# Altium PCB gecko3_Panel.pcbdoc
Units mm, origin at the board's own origin, x right, y up, seen from the top; angles counter-clockwise.
Board outline 201.1 x 138.05 mm, 10 copper layers (Top Layer, MidLayer1, 1.2 & 2.5V Plane, GND Plane1, DDR layer 1, 3.3V Plane, DDR layer 2, GND Plane2, MidLayer2, Bottom Layer), stack 1.39 mm thick; 2 components, 567 nets, 10 pads, 0 vias.
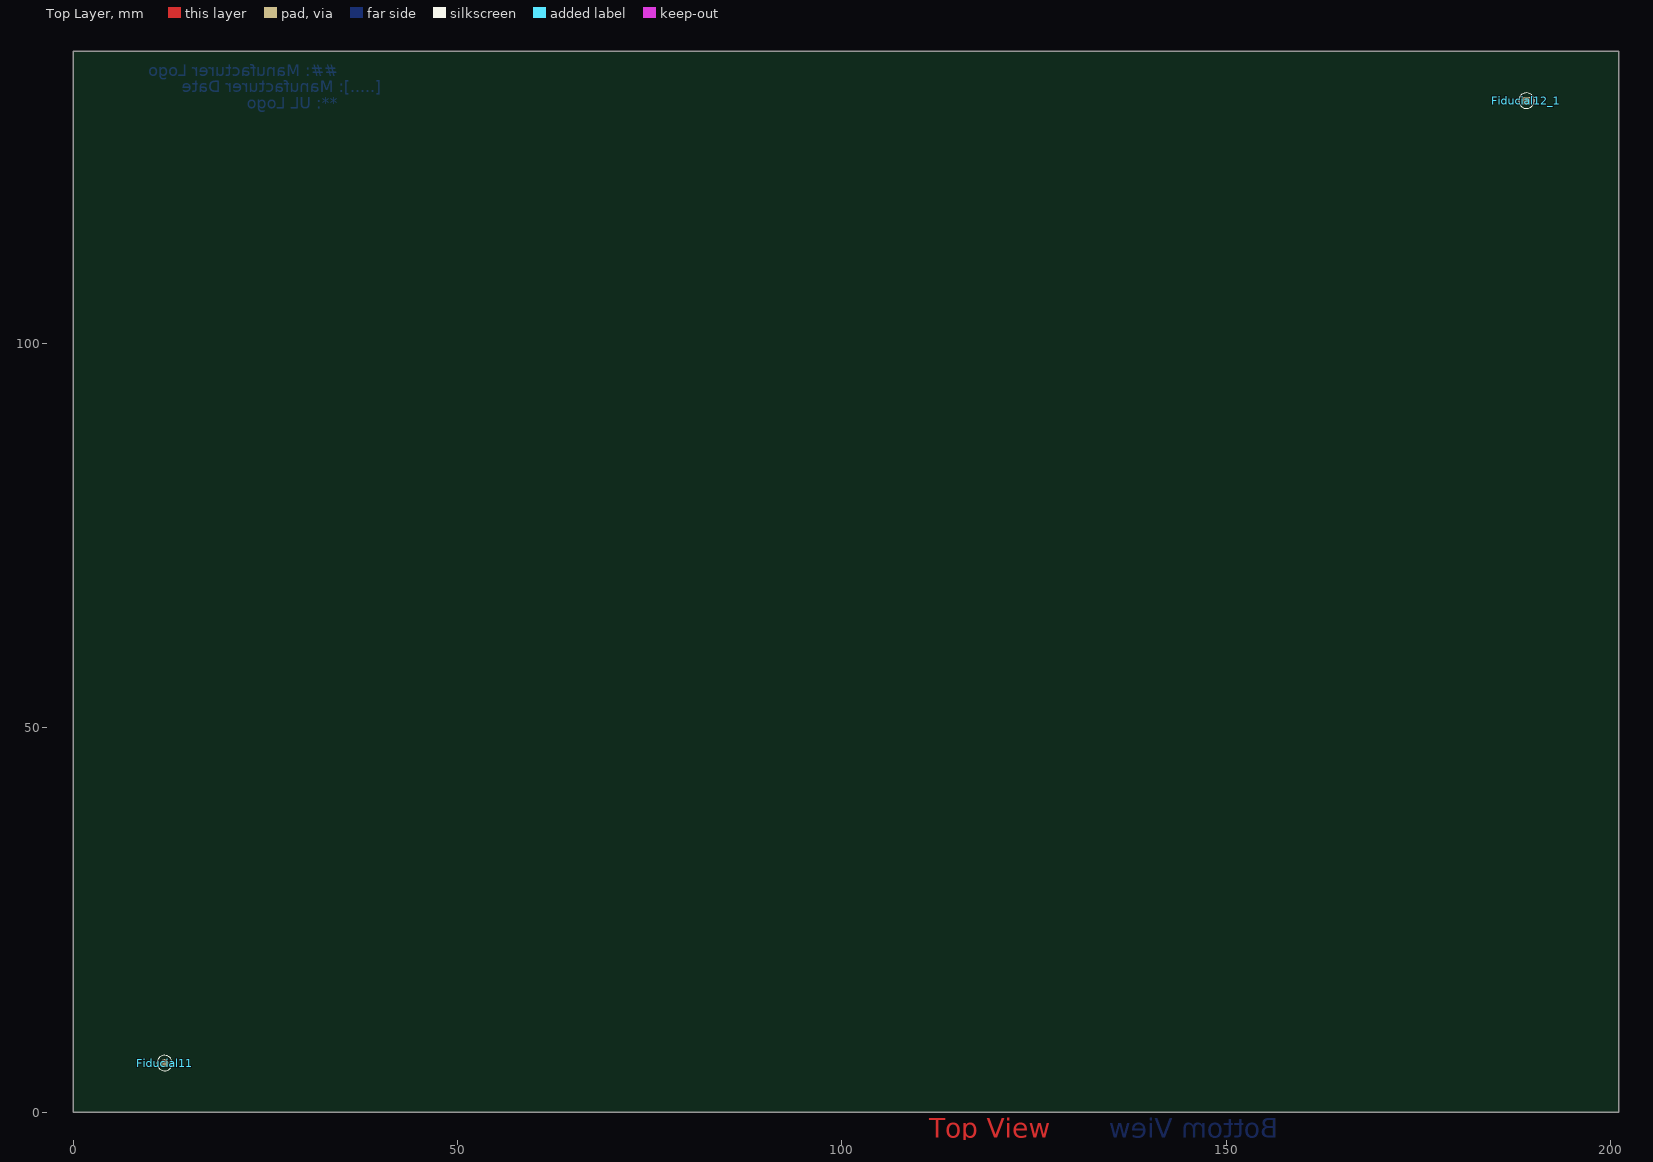
[diagram p0: Top Layer view]
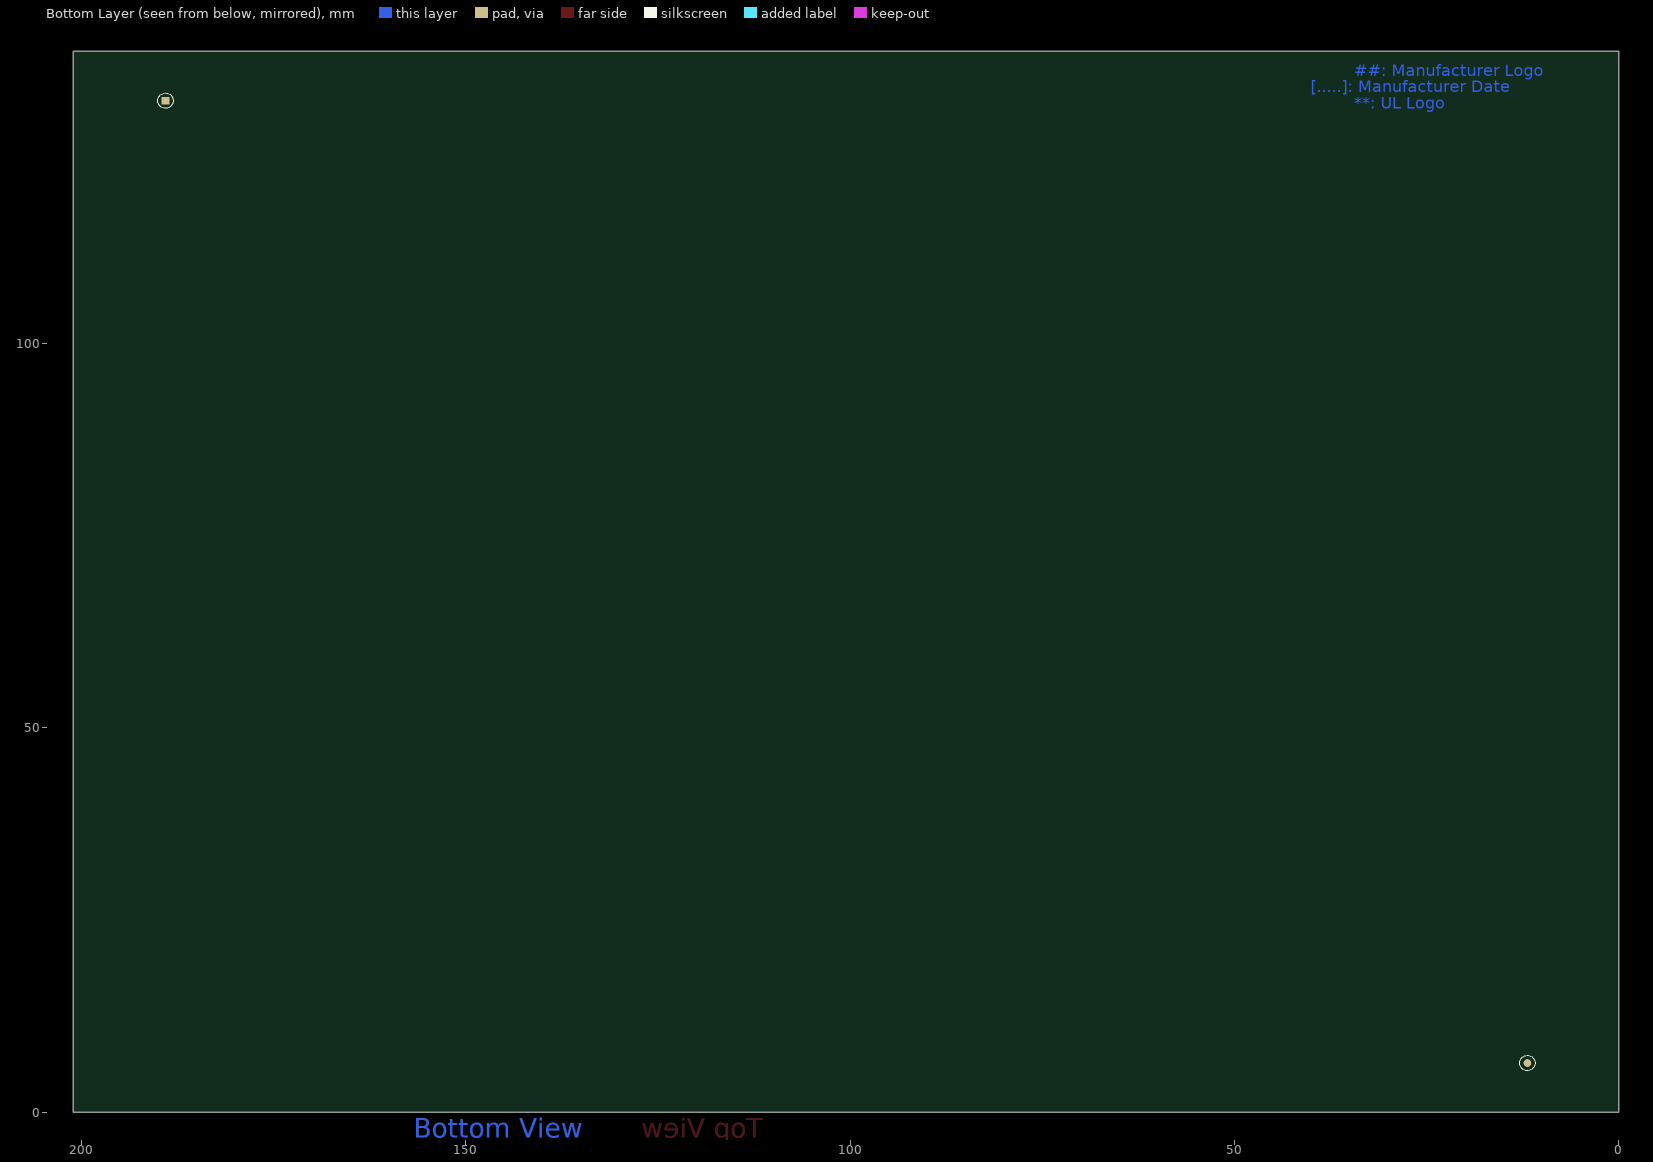
[diagram p1: Bottom Layer view, seen from below]
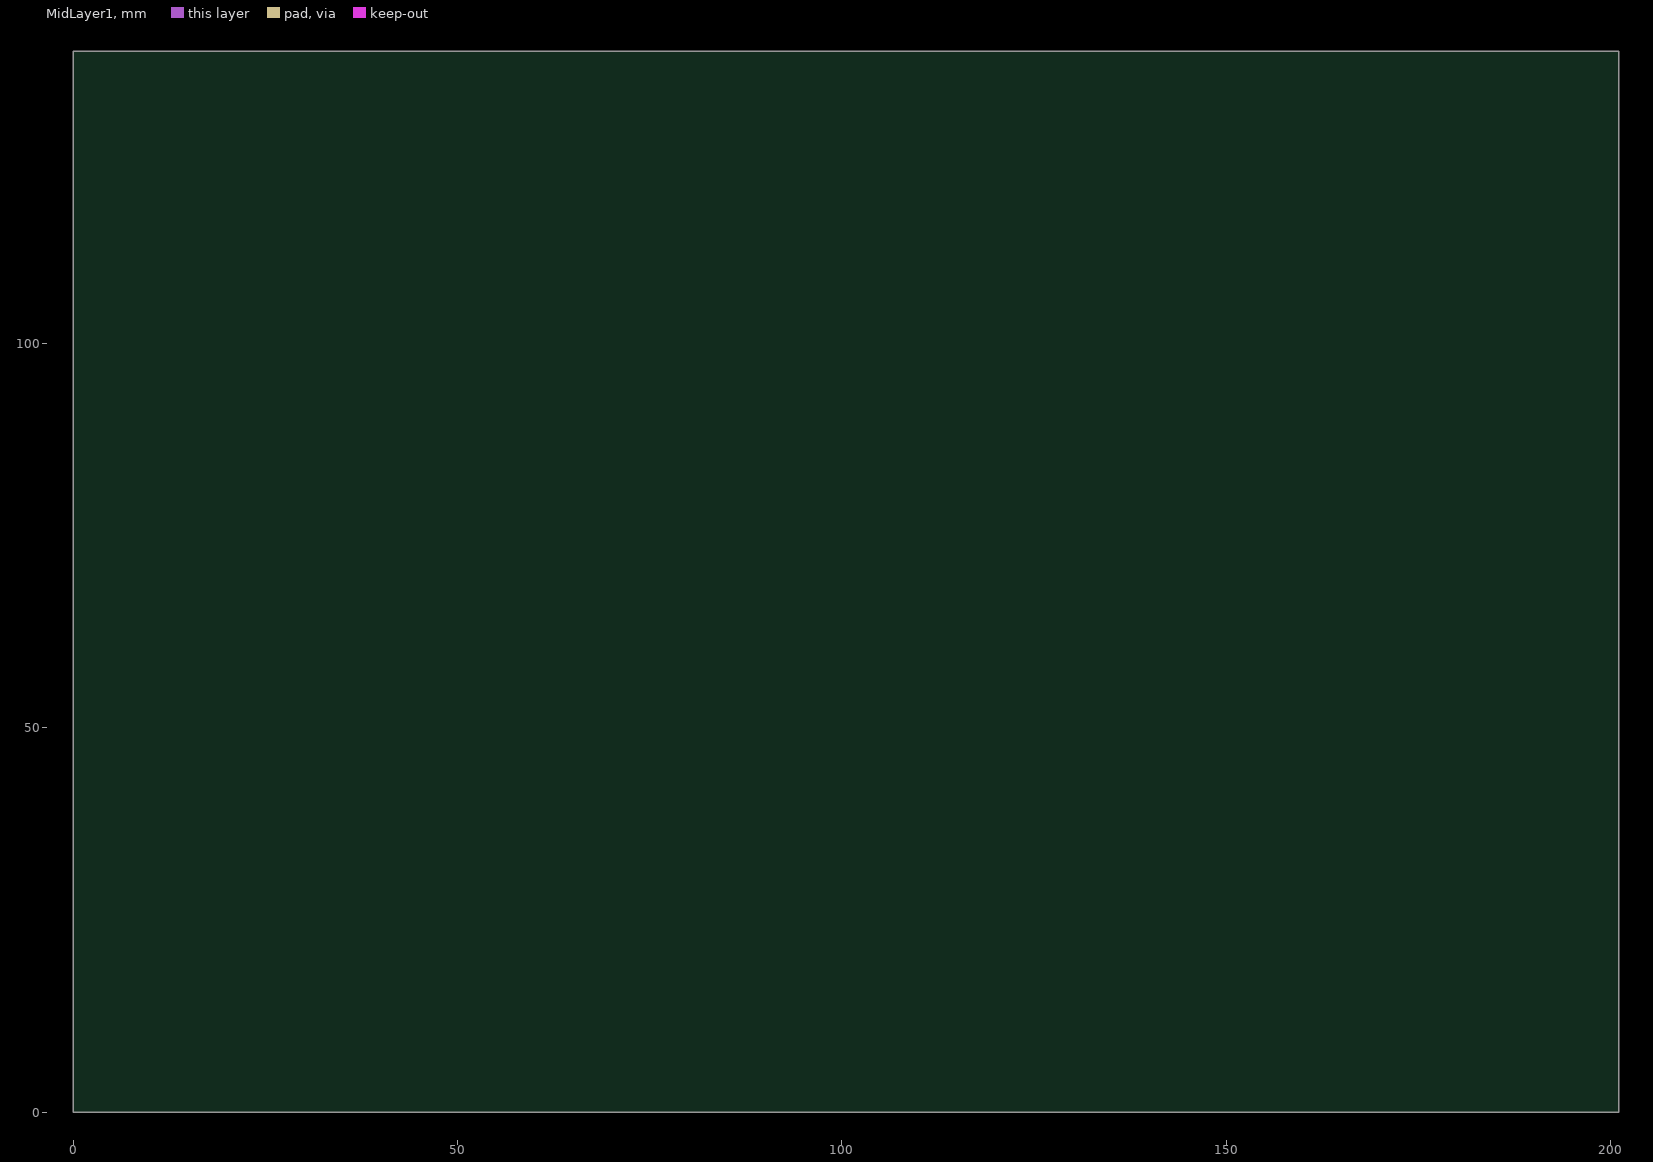
[diagram p2: MidLayer1]
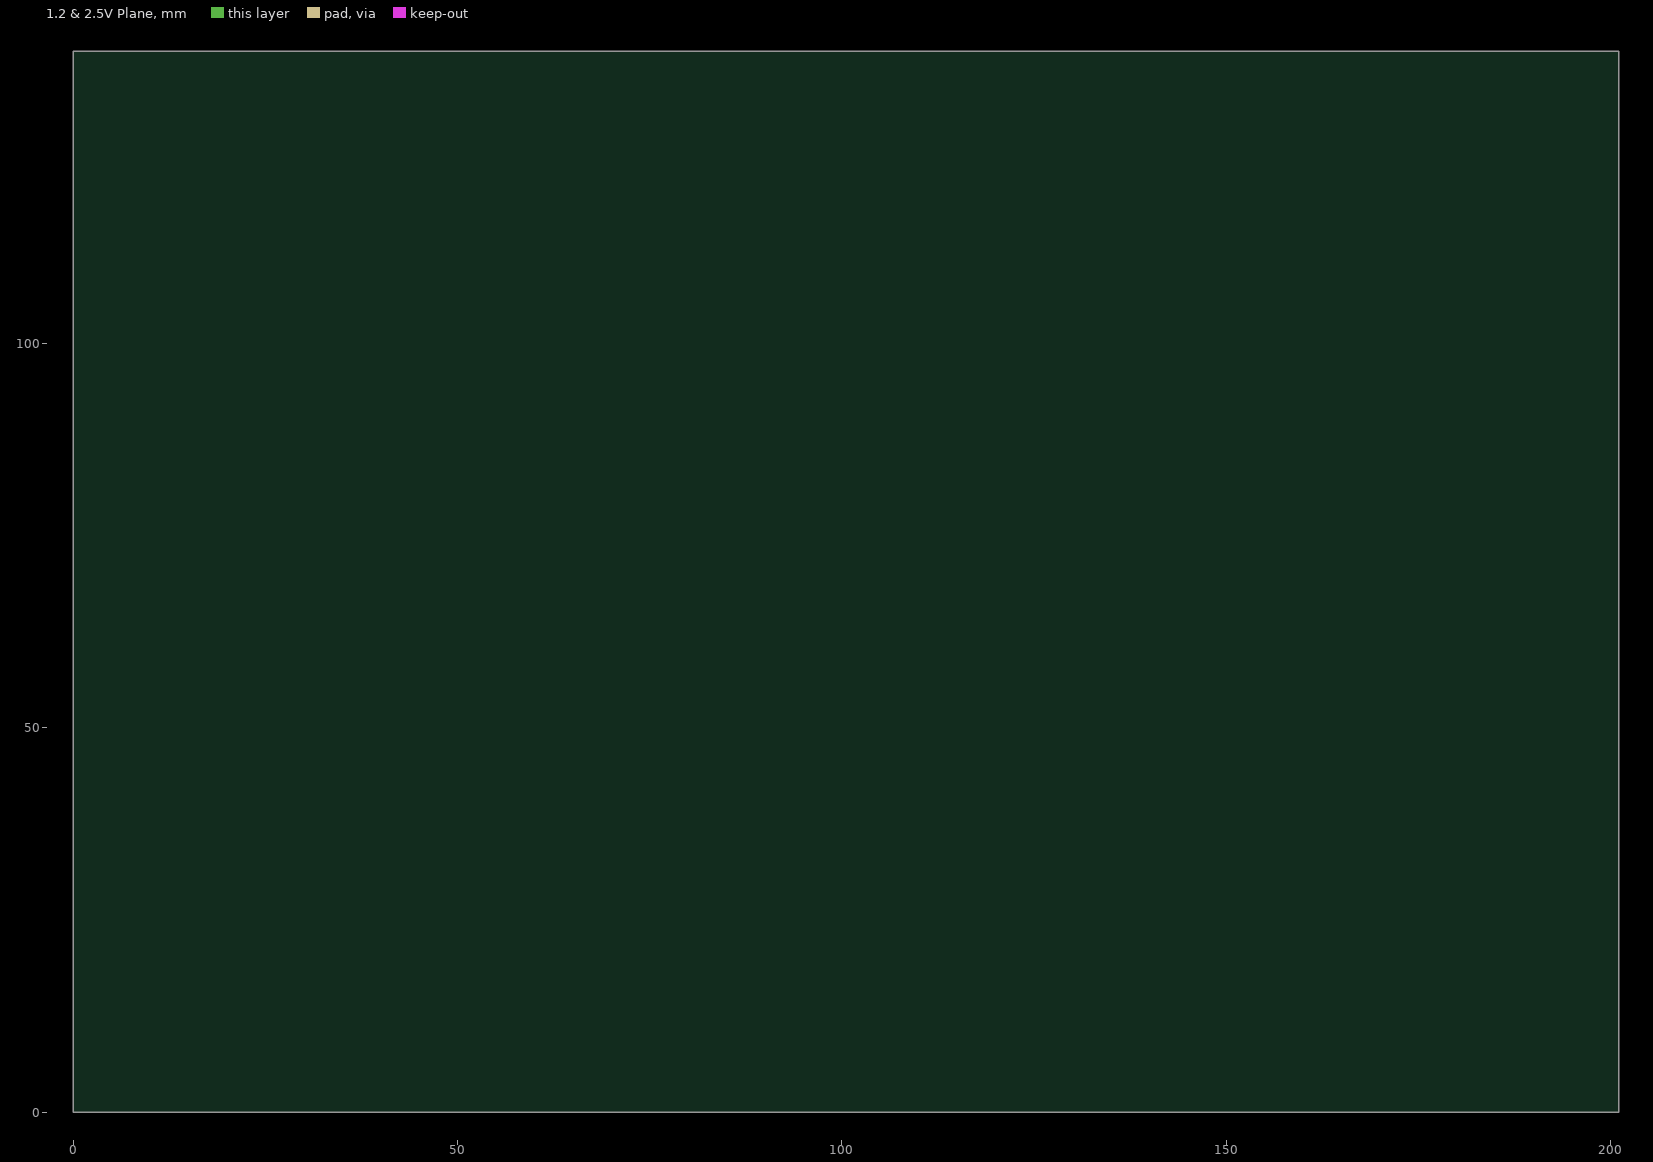
[diagram p3: 1.2 & 2.5V Plane]
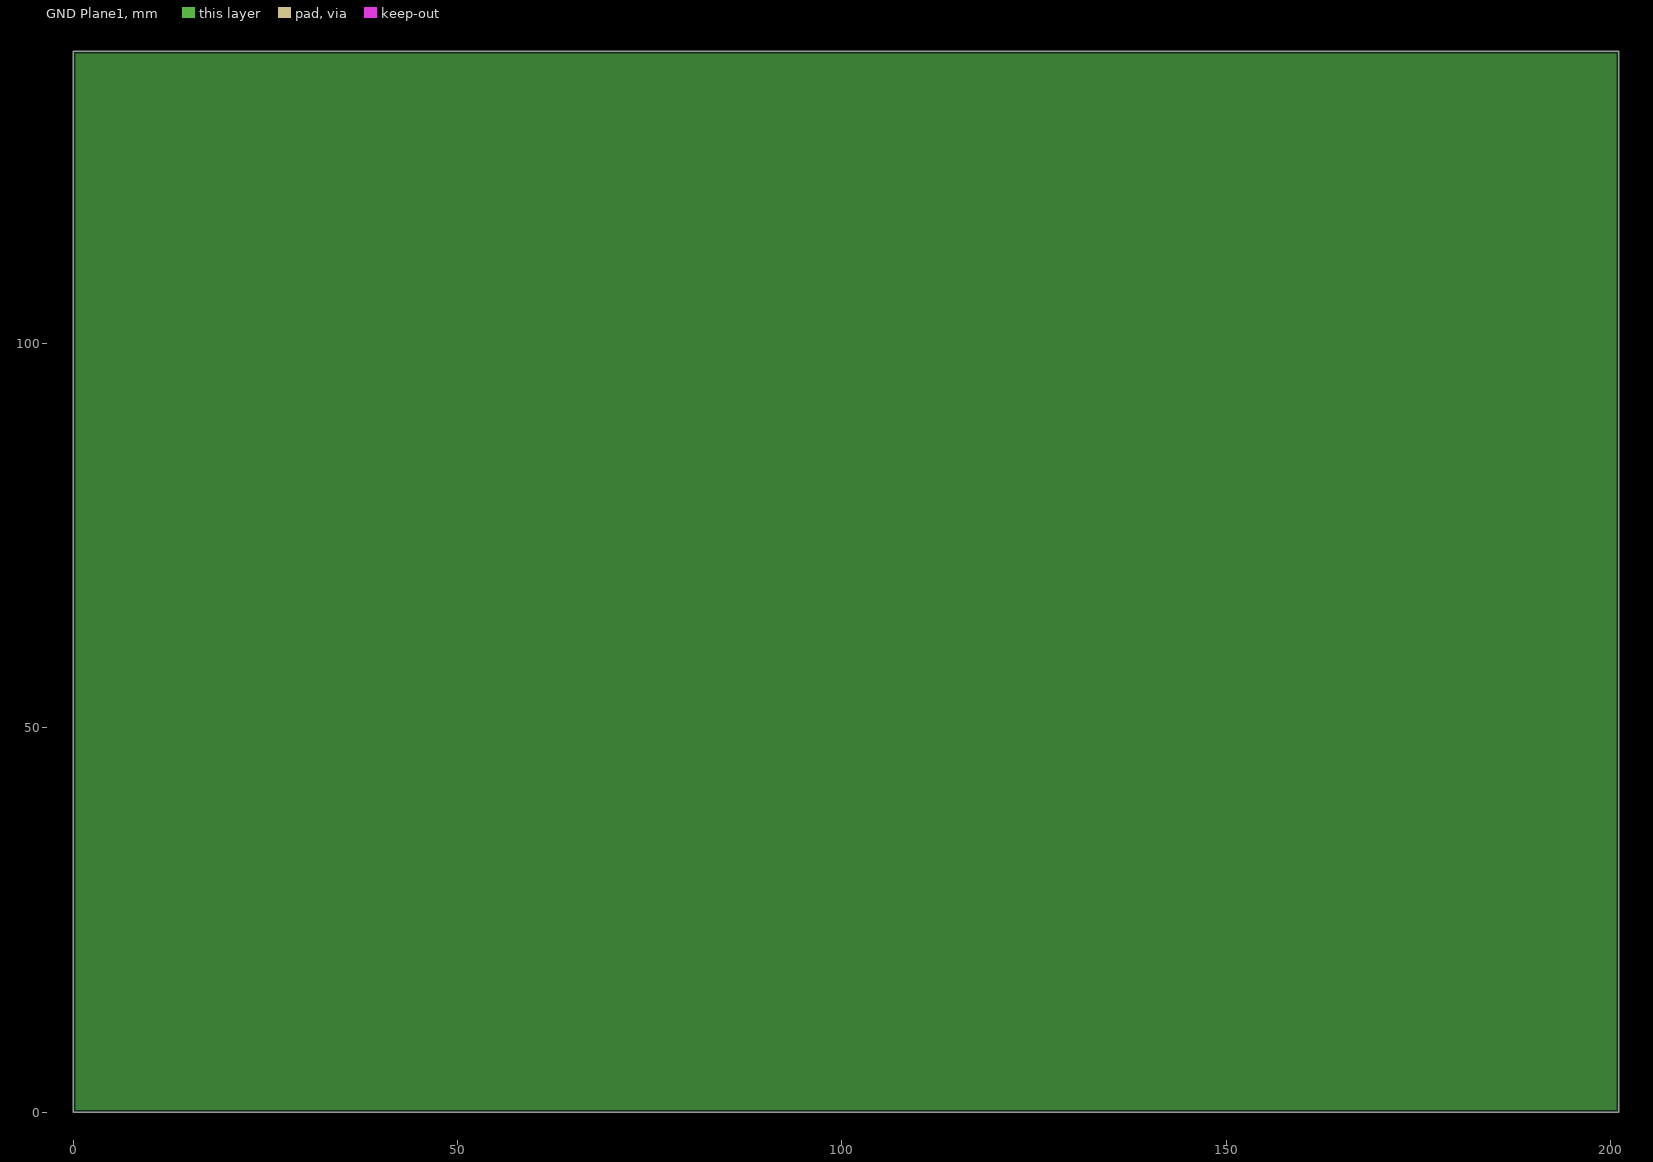
[diagram p4: GND Plane1, clearances drawn from the general rule]
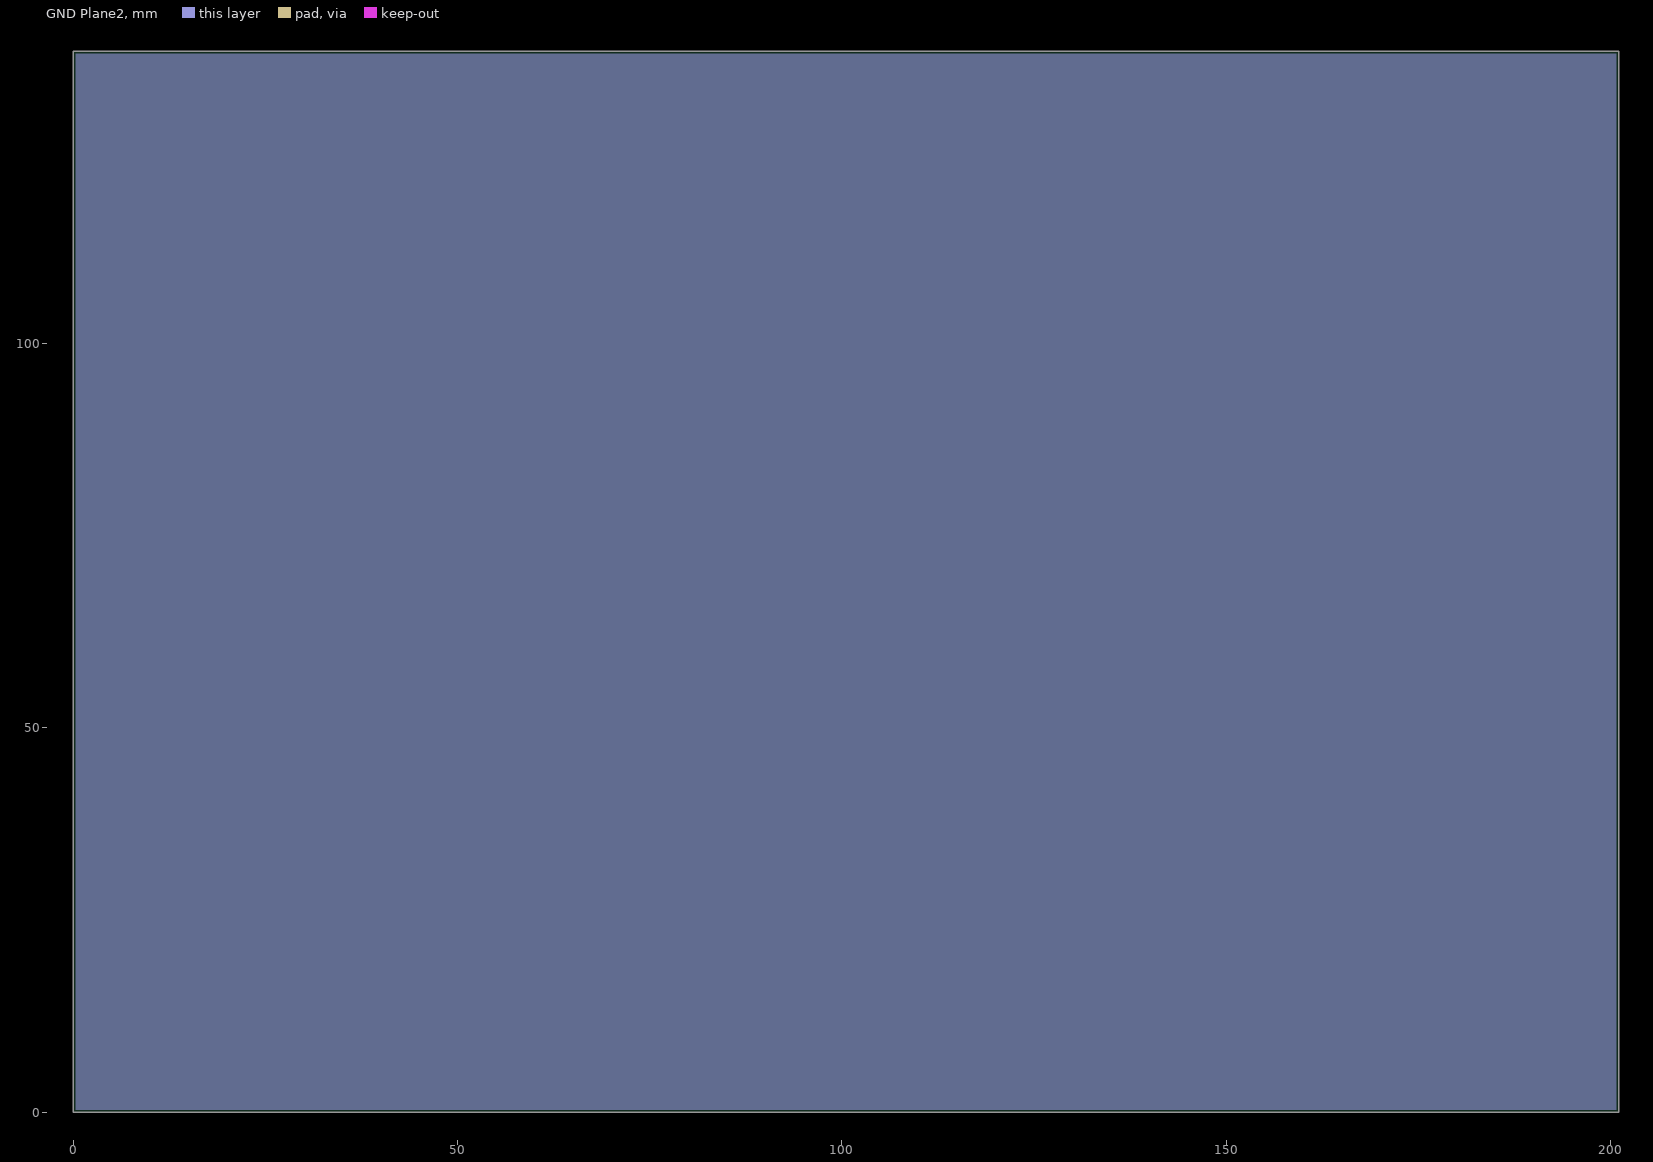
[diagram p5: GND Plane2, clearances drawn from the general rule]

## Layer stack, top to bottom
Top Layer: signal copper 0.018
Dielectric: prepreg 0.11, FR-4, Dk 4.8
MidLayer1: signal copper 0.018
Dielectric: core 0.1, FR-4, Dk 4.8
1.2 & 2.5V Plane: signal copper 0.018
Dielectric: prepreg 0.13, FR-4, Dk 4.8
GND Plane1: plane copper 0.018, net GND
Dielectric: core 0.2, FR-4, Dk 4.8
DDR layer 1: signal copper 0.018
Dielectric: prepreg 0.13, FR-4, Dk 4.8
3.3V Plane: signal copper 0.018
Dielectric: core 0.2, FR-4, Dk 4.8
DDR layer 2: signal copper 0.018
Dielectric: prepreg 0.13, FR-4, Dk 4.8
GND Plane2: plane copper 0.018, net GND
Dielectric: core 0.1, FR-4, Dk 4.8
MidLayer2: signal copper 0.018
Dielectric: prepreg 0.11, FR-4, Dk 4.8
Bottom Layer: signal copper 0.018

## Board outline
0,0 201.1,0 201.1,138.05 0,138.05

## Design rules (kind name [scope] priority, off if disabled: settings)
Clearance Clearance_keepout [OnLayer('Keep-Out Layer')] p1: gap=0
Clearance Clearance_earth [InNet('EARTH')] p2: gap=0.6
Clearance Clearance_plane [InNet('1.2V') vs InNet('2.5V')] p3: gap=0.2
Clearance Clearance_1 [All] p4: gap=0.125
ComponentClearance [OnLayer('Multi-Layer')] p1: gap=0.2 collisioncheckmode=3 verticalgap=0
ComponentClearance ComponentClearanceBottom [OnLayer('Bottom Layer') vs OnLayer('Bottom Layer')] p2: gap=0.2 collisioncheckmode=2 verticalgap=0.254
ComponentClearance ComponentClearanceTop [OnLayer('Top Layer') vs OnLayer('Top Layer')] p3: gap=0.2 collisioncheckmode=2 verticalgap=0.254
DiffPairsRouting [All] p1: maxlimit=0.6 minlimit=0.254 mostfreqgap=0.254 toplayer_maxgap=0.254 midlayer1_mingap=0.48 midlayer1_maxgap=0.52 midlayer1_prefgap=0.5 midlayer2_maxgap=0.254 midlayer3_maxgap=0.254 midlayer4_maxgap=0.254 midlayer6_maxgap=0.254 midlayer8_mingap=0.4 midlayer8_prefgap=0.475 bottomlayer_maxgap=0.254 maxuncoupledlength=12.7
Height Height_connector [InComponentClass('io-bus') Or InComponentClass('io-bus2')] p1: minheight=0 maxheight=25.4 prefheight=12.7
Height "Height on back side" [OnLayer('Bottom Layer')] p2: minheight=0 maxheight=2 prefheight=1
HoleSize [All] p1: absolutevalues=TRUE maxlimit=5 minlimit=0.15 maxpercent=80.000 minpercent=20.000
MatchedLengths "Schematic Matched Net Lengths_4" [InNetClass('ram')] p1: tolerance=3.6 amplitude=2.54 gap=0.508 style=90-Degree
MatchedLengths "Schematic Matched Net Lengths_3" [InNetClass('ram')] p2: tolerance=3.6 amplitude=2.54 gap=0.508 style=90-Degree
MatchedLengths "Schematic Matched Net Lengths_2" [InNetClass('ram-clock')] p3: tolerance=1 amplitude=2.54 gap=0.508 style=90-Degree
MatchedLengths "Schematic Matched Net Lengths_1" [InNetClass('ram-clock')] p4: tolerance=1 amplitude=2.54 gap=0.508 style=90-Degree
MatchedLengths "Schematic Matched Net Lengths" [InNetClass('usb-d')] p5: tolerance=1 amplitude=2.54 gap=0.508 style=90-Degree
MaxMinImpedance "Schematic Impedance Constraint_4" [InNetClass('usb-d')] p1: minimum=79.00 maximum=100.0
MaxMinImpedance "Schematic Impedance Constraint_3" [InNetClass('ram')] p2: minimum=40.00 maximum=70.00
MaxMinImpedance "Schematic Impedance Constraint_2" [InNetClass('ram')] p3: minimum=40.00 maximum=70.00
MaxMinImpedance "Schematic Impedance Constraint_1" [InNetClass('ram-clock')] p4: minimum=40.00 maximum=70.00
MaxMinImpedance "Schematic Impedance Constraint" [InNetClass('ram-clock')] p5: minimum=40.00 maximum=70.00
MaximumViaCount "Schematic Maximum Via Count Constraint_3" [InNetClass('ram-clock')] p1: limit=2
MaximumViaCount "Schematic Maximum Via Count Constraint_2" [InNetClass('ram-clock')] p2: limit=2
MaximumViaCount "Schematic Maximum Via Count Constraint_1" [InNetClass('ram')] p3: limit=2
MaximumViaCount "Schematic Maximum Via Count Constraint" [InNetClass('ram')] p4: limit=2
OvershootFalling "Schematic Overshoot - Falling Edge_3" [InNetClass('ram')] p1: maximum=300.0m
OvershootFalling "Schematic Overshoot - Falling Edge_2" [InNetClass('ram-clock')] p2: maximum=300.0m
OvershootFalling "Schematic Overshoot - Falling Edge_1" [InNetClass('ram-clock')] p3: maximum=300.0m
OvershootFalling "Schematic Overshoot - Falling Edge" [InNetClass('ram')] p4: maximum=300.0m
OvershootRising "Schematic Overshoot - Rising Edge_3" [InNetClass('ram-clock')] p1: maximum=300.0m
OvershootRising "Schematic Overshoot - Rising Edge_2" [InNetClass('ram')] p2: maximum=300.0m
OvershootRising "Schematic Overshoot - Rising Edge_1" [InNetClass('ram-clock')] p3: maximum=300.0m
OvershootRising "Schematic Overshoot - Rising Edge" [InNetClass('ram')] p4: maximum=300.0m
PlaneClearance [All] p1: clearance=0.2
PlaneConnect [All] p1: planeconnectstyle=Direct reliefexpansion=0.508 reliefentries=4 reliefconductorwidth=0.254 reliefairgap=0.254
PolygonConnect [All] p1: connectstyle=Direct reliefconductorwidth=0.254 reliefentries=4 polygonreliefangle="90 Angle"
RoomDefinition dram2 [InComponentClass('dram2')] p1: confinementstyle=ConfineIn formatcopy=TRUE lockcomponents=FALSE outline 382.197,31.267 382.197,34.435 388.272,40.85 392.157,41.325 405.465,41.325 409.825,39.9 410.125,32.7 410.125,28.792 409.725,19.642 405.465,17.667 392.157,17.667 387.847,18.867
RoomDefinition dram1 [InComponentClass('dram1')] p2: confinementstyle=ConfineIn formatcopy=TRUE lockcomponents=FALSE outline 376.632,60.907 376.632,62.235 388.272,64.25 392.157,64.4 405.465,64.4 409.85,63.45 409.85,59.542 409.75,42.817 405.465,40.742 392.157,40.742 388.222,41.792
RoomDefinition power [InComponentClass('power')] p3: confinementstyle=ConfineIn formatcopy=TRUE lockcomponents=FALSE outline 357.996,11.386 357.996,13.514 358.646,18.939 364.444,27.556 390.496,63.829 404.004,63.829 404.004,55.121 402.029,42.561 395.789,15.811 368.464,10.111 363.436,10.111
RoomDefinition io-bus2 [InComponentClass('io-bus2')] p4: confinementstyle=ConfineIn formatcopy=TRUE lockcomponents=FALSE outline 350.479,9.914 350.479,64.349 350.879,64.35 357.907,64.35 358.307,64.349 358.307,9.914
RoomDefinition io-bus [InComponentClass('io-bus')] p5: confinementstyle=ConfineIn formatcopy=TRUE lockcomponents=FALSE outline 340.611,9.914 340.611,64.348 341.011,64.349 348.039,64.349 348.439,64.348 368.938,33.3 368.938,27.842 348.439,9.914
RoomDefinition ethernet [InComponentClass('ethernet')] p6: confinementstyle=ConfineIn formatcopy=TRUE lockcomponents=FALSE outline 404.161,45.811 404.161,56.339 404.236,58.664 404.686,63.881 419.914,63.881 425.445,59.576 425.779,59.229 425.779,52.646 425.439,47.361 421.764,43.721 420.436,43.721
RoomDefinition flash [InComponentClass('flash') vs False] p7: confinementstyle=ConfineIn formatcopy=TRUE lockcomponents=FALSE outline 358.686,18.996 358.686,34.354 384.842,34.858 387.27,34.858 396.814,34.354 399.614,31.514 399.614,30.186 396.814,18.996
RoomDefinition switches [InComponentClass('switches')] p8: confinementstyle=ConfineIn formatcopy=TRUE lockcomponents=FALSE outline 375.911,11.271 375.911,14.439 375.936,18.539 398.602,21.133 409.475,21.133 409.475,10.105 398.909,9.891 378.118,9.891 376.011,10.461
RoomDefinition i2c [InComponentClass('i2c')] p9: confinementstyle=ConfineIn formatcopy=TRUE lockcomponents=FALSE outline 398.291,21.446 398.291,27.559 406.301,27.559 418.306,17.514 420.439,13.364 420.439,10.111 418.311,10.111 405.711,13.186 402.461,14.471
RoomDefinition jtag [InComponentClass('jtag')] p10: confinementstyle=ConfineIn formatcopy=TRUE lockcomponents=FALSE outline 416.161,46.271 416.161,50.879 425.779,50.879 425.909,46.504 425.909,30.556 417.571,30.556
RoomDefinition spi-flash [InComponentClass('spi-flash')] p11: confinementstyle=ConfineIn formatcopy=TRUE lockcomponents=FALSE outline 396.696,31.521 396.696,38.354 406.554,38.354 406.554,31.521
RoomDefinition usb [InComponentClass('usb')] p12: confinementstyle=ConfineIn formatcopy=TRUE lockcomponents=FALSE outline 402.711,39.069 402.711,44.631 407.786,45.614 411.171,45.614 414.339,45.614 423.814,43.789 425.389,33.939 425.564,30.389 425.564,29.061 425.381,14.994 418.484,9.816 409.093,9.816
RoomDefinition fpga-config [InComponentClass('fpga-config')] p13: confinementstyle=ConfineIn formatcopy=TRUE lockcomponents=FALSE outline 347.721,21.561 347.721,22.889 347.746,55.039 347.861,61.389 348.109,64.138 357.911,64.379 359.239,64.379 381.014,64.039 387.214,63.879 401.664,50.264 401.689,42.289 401.689,40.961 395.664,11.336 350.289,9.771 348.161,9.771 347.746,12.911
RoomDefinition fpga1 [InComponentClass('fpga1')] p14: confinementstyle=ConfineIn formatcopy=TRUE lockcomponents=FALSE outline 359.648,34.195 359.648,61.903 371.696,63.256 374.906,63.256 388.156,61.903 398.549,55.147 398.549,47.273 388.156,34.195
RoomDefinition fpga2 [InComponentClass('fpga2')] p15: confinementstyle=ConfineIn formatcopy=TRUE lockcomponents=FALSE outline 387.167,56.827 387.167,60.037 388.578,60.037 388.584,57.217 388.584,54.007 387.172,54.007
RoutingVias [All] p1: holewidth=0.2 width=0.45 viastyle="Through Hole" minholewidth=0.15 minwidth=0.35 maxholewidth=1 maxwidth=2
SignalStimulus "Schematic Signal Stimulus_3" [InNetClass('ram')] p1: kind=2 level=0 starttime=0.000 stoptime=1.800n periodtime=3.600n
SignalStimulus "Schematic Signal Stimulus_2" [InNetClass('ram-clock')] p2: kind=2 level=0 starttime=0.000 stoptime=1.800n periodtime=3.600n
SignalStimulus "Schematic Signal Stimulus_1" [InNetClass('ram')] p3: kind=2 level=0 starttime=0.000 stoptime=1.800n periodtime=3.600n
SignalStimulus "Schematic Signal Stimulus" [InNetClass('ram-clock')] p4: kind=2 level=0 starttime=0.000 stoptime=1.800n periodtime=3.600n
SolderMaskExpansion [All] p1: expansion=0.102
SupplyNets "Schematic Supply Nets_4" [InNet('2.5V')] p1: voltage=2.500
SupplyNets "Schematic Supply Nets_5" [InNet('2.5V')] p2: voltage=2.500
SupplyNets "Schematic Supply Nets_2" [InNet('VREF')] p3: voltage=1.250
SupplyNets "Schematic Supply Nets_3" [InNet('VREF')] p4: voltage=1.250
SupplyNets "Schematic Supply Nets" [InNet('GND')] p5: voltage=0.000
SupplyNets "Schematic Supply Nets_1" [InNet('GND')] p6: voltage=0.000
TestPointUsage [All] p1: valid=0 allowmultiple=FALSE
Testpoint [All] p1: side=15 testpointundercomponent=TRUE minsize=1.016 maxsize=2.54 preferedsize=1.524 minholesize=0 maxholesize=1.016 preferedholesize=0.813 testpointgrid=0.025 style=1023 order=0123456789
UndershootFalling "Schematic Undershoot - Falling Edge_3" [InNetClass('ram')] p1: maximum=300.0m
UndershootFalling "Schematic Undershoot - Falling Edge_2" [InNetClass('ram')] p2: maximum=300.0m
UndershootFalling "Schematic Undershoot - Falling Edge_1" [InNetClass('ram-clock')] p3: maximum=300.0m
UndershootFalling "Schematic Undershoot - Falling Edge" [InNetClass('ram-clock')] p4: maximum=300.0m
UndershootRising "Schematic Undershoot - Rising Edge_3" [InNetClass('ram')] p1: maximum=300.0m
UndershootRising "Schematic Undershoot - Rising Edge_2" [InNetClass('ram')] p2: maximum=300.0m
UndershootRising "Schematic Undershoot - Rising Edge_1" [InNetClass('ram-clock')] p3: maximum=300.0m
UndershootRising "Schematic Undershoot - Rising Edge" [InNetClass('ram-clock')] p4: maximum=300.0m
Width [All] p1: maxlimit=5 minlimit=0.1 preferedwidth=0.2 midlayer4_prefwidth=0.1 midlayer6_prefwidth=0.1 minimp=50.000000 maximp=50.000000 favimp=50.000000
13 further rules are at their usual default settings.

## Classes and differential pairs
net class GPIO2_[0..115]: GPIO2_0 GPIO2_1 GPIO2_2 GPIO2_3 GPIO2_4 GPIO2_5 GPIO2_6 GPIO2_7 GPIO2_8 GPIO2_9 GPIO2_10 GPIO2_11 GPIO2_12 GPIO2_13 GPIO2_14 GPIO2_15 GPIO2_16 GPIO2_17 GPIO2_18 GPIO2_19 GPIO2_20 GPIO2_21 GPIO2_22 GPIO2_23 GPIO2_24 GPIO2_25 GPIO2_26 GPIO2_27 GPIO2_28 GPIO2_29 GPIO2_30 GPIO2_31 GPIO2_32 GPIO2_33 GPIO2_34 GPIO2_35 GPIO2_36 GPIO2_37 GPIO2_38 GPIO2_39 GPIO2_40 GPIO2_41 GPIO2_42 GPIO2_43 GPIO2_44 GPIO2_45 GPIO2_46 GPIO2_47 GPIO2_48 GPIO2_49 GPIO2_50 GPIO2_51 GPIO2_52 GPIO2_53 GPIO2_54 GPIO2_55 GPIO2_56 GPIO2_57 GPIO2_58 GPIO2_59 GPIO2_60 GPIO2_61 GPIO2_62 GPIO2_63 GPIO2_64 GPIO2_65 GPIO2_66 GPIO2_67 GPIO2_68 GPIO2_69 GPIO2_70 GPIO2_71 GPIO2_72 GPIO2_73 GPIO2_74 GPIO2_75 GPIO2_76 GPIO2_77 GPIO2_78 GPIO2_79 GPIO2_80 GPIO2_81 GPIO2_82 GPIO2_83 GPIO2_84 GPIO2_85 GPIO2_86 GPIO2_87 GPIO2_88 GPIO2_89 GPIO2_90 GPIO2_91 GPIO2_92 GPIO2_93 GPIO2_94 GPIO2_95 GPIO2_96 GPIO2_97 GPIO2_98 GPIO2_99 GPIO2_100 GPIO2_101 GPIO2_102 GPIO2_103 GPIO2_104 GPIO2_105 GPIO2_106 GPIO2_107 GPIO2_108 GPIO2_109 GPIO2_110 GPIO2_111 GPIO2_112 GPIO2_113 GPIO2_114 GPIO2_115
net class GPIO1_[0..51]: GPIO1_0 GPIO1_1 GPIO1_2 GPIO1_3 GPIO1_4 GPIO1_5 GPIO1_6 GPIO1_7 GPIO1_8 GPIO1_9 GPIO1_10 GPIO1_11 GPIO1_12 GPIO1_13 GPIO1_14 GPIO1_15 GPIO1_16 GPIO1_17 GPIO1_18 GPIO1_19 GPIO1_20 GPIO1_21 GPIO1_22 GPIO1_23 GPIO1_24 GPIO1_25 GPIO1_26 GPIO1_27 GPIO1_28 GPIO1_29 GPIO1_30 GPIO1_31 GPIO1_32 GPIO1_33 GPIO1_34 GPIO1_35 GPIO1_36 GPIO1_37 GPIO1_38 GPIO1_39 GPIO1_40 GPIO1_41 GPIO1_42 GPIO1_43 GPIO1_44 GPIO1_45 GPIO1_46 GPIO1_47 GPIO1_48 GPIO1_49 GPIO1_50 GPIO1_51
net class FLASH_D1_[0..15]: FLASH_D1_0 FLASH_D1_1 FLASH_D1_2 FLASH_D1_3 FLASH_D1_4 FLASH_D1_5 FLASH_D1_6 FLASH_D1_7 FLASH_D1_8 FLASH_D1_9 FLASH_D1_10 FLASH_D1_11 FLASH_D1_12 FLASH_D1_13 FLASH_D1_14 FLASH_D1_15
net class FLASH_D0_[0..15]: FLASH_D0_0 FLASH_D0_1 FLASH_D0_2 FLASH_D0_3 FLASH_D0_4 FLASH_D0_5 FLASH_D0_6 FLASH_D0_7 FLASH_D0_8 FLASH_D0_9 FLASH_D0_10 FLASH_D0_11 FLASH_D0_12 FLASH_D0_13 FLASH_D0_14 FLASH_D0_15
net class DRAM_A1_[0..13]: DRAM_A1_0 DRAM_A1_1 DRAM_A1_2 DRAM_A1_3 DRAM_A1_4 DRAM_A1_5 DRAM_A1_6 DRAM_A1_7 DRAM_A1_8 DRAM_A1_9 DRAM_A1_10 DRAM_A1_11 DRAM_A1_12 DRAM_A1_13 DRAM_A1_14 DRAM_A1_15
net class DRAM_A0_[0..13]: DRAM_A0 DRAM_A0_0 DRAM_A0_1 DRAM_A0_2 DRAM_A0_3 DRAM_A0_4 DRAM_A0_5 DRAM_A0_6 DRAM_A0_7 DRAM_A0_8 DRAM_A0_9 DRAM_A0_10 DRAM_A0_11 DRAM_A0_12 DRAM_A0_13 DRAM_A1 DRAM_A2 DRAM_A3 DRAM_A4 DRAM_A5 DRAM_A6 DRAM_A7 DRAM_A8 DRAM_A9 DRAM_A10 DRAM_A11 DRAM_A12 DRAM_A13
net class BUTTON[0..2]: BUTTON0 BUTTON1 BUTTON2
net class usb-d: NetJP1_USB_D+ NetJP1_USB_D-
net class TXD_[0..3]: TXD_0 TXD_1 TXD_2 TXD_3
net class RXD_[0..3]: RXD_0 RXD_1 RXD_2 RXD_3
net class LED[0..7]: LED0 LED1 LED2 LED3 LED4 LED5 LED6 LED7
component class spi-flash: U1_SPI
net class SWITCH[0..3]: SWITCH0 SWITCH1 SWITCH2 SWITCH3
net class PWM[0..7]: PWM0 PWM1 PWM2 PWM3 PWM4 PWM5 PWM6 PWM7
net class ENCODER[0..7]: ENCODER0 ENCODER1 ENCODER2 ENCODER3 ENCODER4 ENCODER5 ENCODER6 ENCODER7
net class D[0..15]: D0 D1 D2 D3 D4 D5 D6 D7 D8 D9 D10 D11 D12 D13 D14 D15
net class DRAM_D0_[0..15]: DRAM_D0_0 DRAM_D0_1 DRAM_D0_2 DRAM_D0_3 DRAM_D0_4 DRAM_D0_5 DRAM_D0_6 DRAM_D0_7 DRAM_D0_8 DRAM_D0_9 DRAM_D0_10 DRAM_D0_11 DRAM_D0_12 DRAM_D0_13 DRAM_D0_14 DRAM_D0_15 DRAM_DQ0 DRAM_DQ1 DRAM_DQ2 DRAM_DQ3 DRAM_DQ4 DRAM_DQ5 DRAM_DQ6 DRAM_DQ7 DRAM_DQ8 DRAM_DQ9 DRAM_DQ10 DRAM_DQ11 DRAM_DQ12 DRAM_DQ13 DRAM_DQ14 DRAM_DQ15
net class DRAM_D1_[0..15]: DRAM_D1_0 DRAM_D1_1 DRAM_D1_2 DRAM_D1_3 DRAM_D1_4 DRAM_D1_5 DRAM_D1_6 DRAM_D1_7 DRAM_D1_8 DRAM_D1_9 DRAM_D1_10 DRAM_D1_11 DRAM_D1_12 DRAM_D1_13 DRAM_D1_14 DRAM_D1_15
net class FLASH_A[0..23]: FLASH_A0 FLASH_A1 FLASH_A2 FLASH_A3 FLASH_A4 FLASH_A5 FLASH_A6 FLASH_A7 FLASH_A8 FLASH_A9 FLASH_A10 FLASH_A11 FLASH_A12 FLASH_A13 FLASH_A14 FLASH_A15 FLASH_A16 FLASH_A17 FLASH_A18 FLASH_A19 FLASH_A20 FLASH_A21 FLASH_A22 FLASH_A23
net class ram-clock: DRAM_C\K\0 DRAM_C\K\1 DRAM_CK0 DRAM_CK0_FB DRAM_CK1 DRAM_CK1_FB
net class ram: DRAM_A0_0 DRAM_A0_1 DRAM_A0_2 DRAM_A0_3 DRAM_A0_4 DRAM_A0_5 DRAM_A0_6 DRAM_A0_7 DRAM_A0_8 DRAM_A0_9 DRAM_A0_10 DRAM_A0_11 DRAM_A0_12 DRAM_A0_13 DRAM_A1_0 DRAM_A1_1 DRAM_A1_2 DRAM_A1_3 DRAM_A1_4 DRAM_A1_5 DRAM_A1_6 DRAM_A1_7 DRAM_A1_8 DRAM_A1_9 DRAM_A1_10 DRAM_A1_11 DRAM_A1_12 DRAM_A1_13 DRAM_BA0_0 DRAM_BA0_1 DRAM_BA1_0 DRAM_BA1_1 DRAM_C\A\S\0 DRAM_C\A\S\1 DRAM_C\K\0 DRAM_C\K\1 DRAM_C\S\0 DRAM_C\S\1 DRAM_CK0 DRAM_CK0_FB DRAM_CK1 DRAM_CK1_FB DRAM_CKE0 DRAM_CKE1 DRAM_D0_0 DRAM_D0_1 DRAM_D0_2 DRAM_D0_3 DRAM_D0_4 DRAM_D0_5 DRAM_D0_6 DRAM_D0_7 DRAM_D0_8 DRAM_D0_9 DRAM_D0_10 DRAM_D0_11 DRAM_D0_12 DRAM_D0_13 DRAM_D0_14 DRAM_D0_15 DRAM_D1_0 DRAM_D1_1 DRAM_D1_2 DRAM_D1_3 DRAM_D1_4 DRAM_D1_5 DRAM_D1_6 DRAM_D1_7 DRAM_D1_8 DRAM_D1_9 DRAM_D1_10 DRAM_D1_11 DRAM_D1_12 DRAM_D1_13 DRAM_D1_14 DRAM_D1_15 DRAM_LDM0 DRAM_LDM1 DRAM_LDQS0 DRAM_LDQS1 DRAM_R\A\S\0 DRAM_R\A\S\1 DRAM_UDM0 DRAM_UDM1 DRAM_UDQS0 DRAM_UDQS1 DRAM_W\E\0 DRAM_W\E\1
differential pair eth_td: +TD+ -TD-
differential pair eth_rd: +RD+ -RD-
differential pair DRAM_clk1: +DRAM_CK1 -DRAM_C\K\1
differential pair DRAM_clk0: +DRAM_CK0 -DRAM_C\K\0
differential pair usb_data: +NetJP1_USB_D+ -NetJP1_USB_D-

## Components (designator, comment, footprint, x,y, rotation, side; value= is the part's Value field where it differs from the comment)
Fiducial11 "" FIDUCIAL1MM 11.9,6.4 r270 top
Fiducial12_1 "" FIDUCIAL1MM-RECT 189.075,131.6 r270 top

## Footprints (in the part's own frame and the unit in brackets; to place one, negate y for a bottom-side part, rotate by r counter-clockwise, add the part's x,y. Pads: shape width x height; smd on the part's side, far side on the other; paste and mask are expansions set on the pad)
FIDUCIAL1MM [mm]
  round 1 smd: 0(0,0)
  round 1 smd far side: 0(0,0)
  round 1 on Top Paste: 0(0,0)
  round 1 on Bottom Paste: 0(0,0)
  round 2 on Top Solder: 0(0,0)
  round 2 on Bottom Solder: 0(0,0)
  silkscreen extent -1,-1 1,1
FIDUCIAL1MM-RECT [mm]
  rect 1x1 smd mask+0.5: 0(0,0)
  rect 1x1 smd far side mask+0.5: 0(0,0)
  rect 1x1 on Top Paste: 0(0,0)
  rect 1x1 on Bottom Paste: 0(0,0)
  silkscreen extent -1,-1 1,1

## Nets (pads, with @x,y where several pads share a name; then routed paths per layer and width w, separated by ;. In a path a pad name is that pad's centre, name@x,y a point inside that pad or via, vN(x,y) a via of type N, cw(c..) or ccw(c..) an arc to the next point about the centre after c; other vN are vias at no path point)
1.2V: 
2.5V: 
3.3V: 
BUSY/RDYX: 
BUTTON0: 
BUTTON1: 
BUTTON2: 
CCLK: 
CLK: 
COL: 
CRS: 
CS_B/RDYU: 
D0: 
D1: 
D2: 
D3: 
D4: 
D5: 
D6: 
D7: 
D8: 
D9: 
D10: 
D11: 
D12: 
D13: 
D14: 
D15: 
DONE: 
DRAM_A0_0: 
DRAM_A0_1: 
DRAM_A0_2: 
DRAM_A0_3: 
DRAM_A0_4: 
DRAM_A0_5: 
DRAM_A0_6: 
DRAM_A0_7: 
DRAM_A0_8: 
DRAM_A0_9: 
DRAM_A0_10: 
DRAM_A0_11: 
DRAM_A0_12: 
DRAM_A0_13: 
DRAM_A1_0: 
DRAM_A1_1: 
DRAM_A1_2: 
DRAM_A1_3: 
DRAM_A1_4: 
DRAM_A1_5: 
DRAM_A1_6: 
DRAM_A1_7: 
DRAM_A1_8: 
DRAM_A1_9: 
DRAM_A1_10: 
DRAM_A1_11: 
DRAM_A1_12: 
DRAM_A1_13: 
DRAM_BA0_0: 
DRAM_BA0_1: 
DRAM_BA1_0: 
DRAM_BA1_1: 
DRAM_C\A\S\0: 
DRAM_C\A\S\1: 
DRAM_C\K\0: 
DRAM_C\K\1: 
DRAM_C\S\0: 
DRAM_C\S\1: 
DRAM_CK0: 
DRAM_CK0_FB: 
DRAM_CK1: 
DRAM_CK1_FB: 
DRAM_CKE0: 
DRAM_CKE1: 
DRAM_D0_0: 
DRAM_D0_1: 
DRAM_D0_2: 
DRAM_D0_3: 
DRAM_D0_4: 
DRAM_D0_5: 
DRAM_D0_6: 
DRAM_D0_7: 
DRAM_D0_8: 
DRAM_D0_9: 
DRAM_D0_10: 
DRAM_D0_11: 
DRAM_D0_12: 
DRAM_D0_13: 
DRAM_D0_14: 
DRAM_D0_15: 
DRAM_D1_0: 
DRAM_D1_1: 
DRAM_D1_2: 
DRAM_D1_3: 
DRAM_D1_4: 
DRAM_D1_5: 
DRAM_D1_6: 
DRAM_D1_7: 
DRAM_D1_8: 
DRAM_D1_9: 
DRAM_D1_10: 
DRAM_D1_11: 
DRAM_D1_12: 
DRAM_D1_13: 
DRAM_D1_14: 
DRAM_D1_15: 
DRAM_LDM0: 
DRAM_LDM1: 
DRAM_LDQS0: 
DRAM_LDQS1: 
DRAM_R\A\S\0: 
DRAM_R\A\S\1: 
DRAM_UDM0: 
DRAM_UDM1: 
DRAM_UDQS0: 
DRAM_UDQS1: 
DRAM_W\E\0: 
DRAM_W\E\1: 
EARTH: 
ENCODER0: 
ENCODER1: 
ENCODER2: 
ENCODER3: 
ENCODER4: 
ENCODER5: 
ENCODER6: 
ENCODER7: 
ETH_R\E\S\E\T\: 
EXTCLK0: 
EXTCLK1: 
FLASH_A0: 
FLASH_A1: 
FLASH_A2: 
FLASH_A3: 
FLASH_A4: 
FLASH_A5: 
FLASH_A6: 
FLASH_A7: 
FLASH_A8: 
FLASH_A9: 
FLASH_A10: 
FLASH_A11: 
FLASH_A12: 
FLASH_A13: 
FLASH_A14: 
FLASH_A15: 
FLASH_A16: 
FLASH_A17: 
FLASH_A18: 
FLASH_A19: 
FLASH_A20: 
FLASH_A21: 
FLASH_A22: 
FLASH_A23: 
FLASH_B\Y\T\E\: 
FLASH_C\E\0\: 
FLASH_D0_0: 
FLASH_D0_1: 
FLASH_D0_2: 
FLASH_D0_3: 
FLASH_D0_4: 
FLASH_D0_5: 
FLASH_D0_6: 
FLASH_D0_7: 
FLASH_D0_8: 
FLASH_D0_9: 
FLASH_D0_10: 
FLASH_D0_11: 
FLASH_D0_12: 
FLASH_D0_13: 
FLASH_D0_14: 
FLASH_D0_15: 
FLASH_D1_0: 
FLASH_D1_1: 
FLASH_D1_2: 
FLASH_D1_3: 
FLASH_D1_4: 
FLASH_D1_5: 
FLASH_D1_6: 
FLASH_D1_7: 
FLASH_D1_8: 
FLASH_D1_9: 
FLASH_D1_10: 
FLASH_D1_11: 
FLASH_D1_12: 
FLASH_D1_13: 
FLASH_D1_14: 
FLASH_D1_15: 
FLASH_O\E\: 
FLASH_R\P\: 
FLASH_W\E\: 
GND: 
GPIO1_0: 
GPIO1_1: 
GPIO1_2: 
GPIO1_3: 
GPIO1_4: 
GPIO1_5: 
GPIO1_6: 
GPIO1_7: 
GPIO1_8: 
GPIO1_9: 
GPIO1_10: 
GPIO1_11: 
GPIO1_12: 
GPIO1_13: 
GPIO1_14: 
GPIO1_15: 
GPIO1_16: 
GPIO1_17: 
GPIO1_18: 
GPIO1_19: 
GPIO1_20: 
GPIO1_21: 
GPIO1_22: 
GPIO1_23: 
GPIO1_24: 
GPIO1_25: 
GPIO1_26: 
GPIO1_27: 
GPIO1_28: 
GPIO1_29: 
GPIO1_30: 
GPIO1_31: 
GPIO1_32: 
GPIO1_33: 
GPIO1_34: 
GPIO1_35: 
GPIO1_36: 
GPIO1_37: 
GPIO1_38: 
GPIO1_39: 
GPIO1_40: 
GPIO1_41: 
GPIO1_42: 
GPIO1_43: 
GPIO1_44: 
GPIO1_45: 
GPIO1_46: 
GPIO1_47: 
GPIO1_48: 
GPIO1_49: 
GPIO1_50: 
GPIO1_51: 
GPIO2_0: 
GPIO2_1: 
GPIO2_2: 
GPIO2_3: 
GPIO2_4: 
GPIO2_5: 
GPIO2_6: 
GPIO2_7: 
GPIO2_8: 
GPIO2_9: 
GPIO2_10: 
GPIO2_11: 
GPIO2_12: 
GPIO2_13: 
GPIO2_14: 
GPIO2_15: 
GPIO2_16: 
GPIO2_17: 
GPIO2_18: 
GPIO2_19: 
GPIO2_20: 
GPIO2_21: 
GPIO2_22: 
GPIO2_23: 
GPIO2_24: 
GPIO2_25: 
GPIO2_26: 
GPIO2_27: 
GPIO2_28: 
GPIO2_29: 
GPIO2_30: 
GPIO2_31: 
GPIO2_32: 
GPIO2_33: 
GPIO2_34: 
GPIO2_35: 
GPIO2_36: 
GPIO2_37: 
GPIO2_38: 
GPIO2_39: 
GPIO2_40: 
GPIO2_41: 
GPIO2_42: 
GPIO2_43: 
GPIO2_44: 
GPIO2_45: 
GPIO2_46: 
GPIO2_47: 
GPIO2_48: 
GPIO2_49: 
GPIO2_50: 
GPIO2_51: 
GPIO2_52: 
GPIO2_53: 
GPIO2_54: 
GPIO2_55: 
GPIO2_56: 
GPIO2_57: 
GPIO2_58: 
GPIO2_59: 
GPIO2_60: 
GPIO2_61: 
GPIO2_62: 
GPIO2_63: 
GPIO2_64: 
GPIO2_65: 
GPIO2_66: 
GPIO2_67: 
GPIO2_68: 
GPIO2_69: 
GPIO2_70: 
GPIO2_71: 
GPIO2_72: 
GPIO2_73: 
GPIO2_74: 
GPIO2_75: 
GPIO2_76: 
GPIO2_77: 
GPIO2_78: 
GPIO2_79: 
GPIO2_80: 
GPIO2_81: 
GPIO2_82: 
GPIO2_83: 
GPIO2_84: 
GPIO2_85: 
GPIO2_86: 
GPIO2_87: 
GPIO2_88: 
GPIO2_89: 
GPIO2_90: 
GPIO2_91: 
GPIO2_92: 
GPIO2_93: 
GPIO2_94: 
GPIO2_95: 
GPIO2_96: 
GPIO2_97: 
GPIO2_98: 
GPIO2_99: 
GPIO2_100: 
GPIO2_101: 
GPIO2_102: 
GPIO2_103: 
GPIO2_104: 
GPIO2_105: 
GPIO2_106: 
GPIO2_107: 
GPIO2_108: 
GPIO2_109: 
GPIO2_110: 
GPIO2_111: 
GPIO2_112: 
GPIO2_113: 
GPIO2_114: 
GPIO2_115: 
IFCLK: 
INIT_B/WRX: 
LED0: 
LED1: 
LED2: 
LED3: 
LED4: 
LED5: 
LED6: 
LED7: 
LINESENSORCLK: 
LINESENSORIN1: 
LINESENSORIN2: 
LINESENSOROUT1: 
LINESENSOROUT2: 
"LOW BATTERY": 
MDC: 
MDIO: 
MISO: 
MOSI: 
NetC1_PWR_2: 
NetC2_PWR_2: 
NetC2_USB_2: 
NetC3_PWR_2: 
NetC3_USB_2: 
NetC4_ETH_2: 
NetC4_USB_2: 
NetC6_ETH_2: 
NetC6_PWR_2: 
NetC9_ETH_2: 
NetC10_ETH_2: 
NetC22_PWR_1: 
NetD1_ETH_2: 
NetD1_ETH_4: 
NetD1_I2C_1: 
NetD1_I2C_3: 
NetD1_SW_1: 
NetD1_SW_3: 
NetD2_SW_1: 
NetD2_SW_3: 
NetD3_SW_1: 
NetD3_SW_3: 
NetD4_SW_1: 
NetD4_SW_3: 
NetFB1_IO_2: 
NetFB1_USB_1: 
NetFB1_USB_2: 
NetFB2_IO_2: 
NetJP1_JTAG_1: 
NetJP1_JTAG_2: 
NetJP1_JTAG_4: 
NetJP1_USB_D+: 
NetJP1_USB_D-: 
NetL1_PWR_1: 
NetQ1_FP1_3: 
NetR1_ETH_2: 
NetR1_I2C_2: 
NetR2_ETH_2: 
NetR2_I2C_2: 
NetR2_PWR_1: 
NetR3_CNF_2: 
NetR3_FL_1: 
NetR3_I2C_1: 
NetR4_CNF_2: 
NetR4_ETH_1: 
NetR4_FL_1: 
NetR4_USB_1: 
NetR5_ETH_1: 
NetR6_USB_1: 
NetR10_ETH_2: 
NetR11_ETH_2: 
NetRA1_R0_5: 
NetRA1_R0_6: 
NetRA1_R0_7: 
NetRA1_R0_8: 
NetRA1_R1_5: 
NetRA1_R1_6: 
NetRA1_R1_7: 
NetRA1_R1_8: 
NetRA2_R0_5: 
NetRA2_R0_6: 
NetRA2_R0_7: 
NetRA2_R0_8: 
NetRA2_R1_5: 
NetRA2_R1_6: 
NetRA2_R1_7: 
NetRA2_R1_8: 
NetRA3_R0_5: 
NetRA3_R0_6: 
NetRA3_R0_7: 
NetRA3_R0_8: 
NetRA3_R1_5: 
NetRA3_R1_6: 
NetRA3_R1_7: 
NetRA3_R1_8: 
NetRA4_R0_5: 
NetRA4_R0_6: 
NetRA4_R0_7: 
NetRA4_R0_8: 
NetRA4_R1_5: 
NetRA4_R1_6: 
NetRA4_R1_7: 
NetRA4_R1_8: 
NetRA5_R0_1: 
NetRA5_R0_2: 
NetRA5_R0_3: 
NetRA5_R0_4: 
NetRA5_R1_1: 
NetRA5_R1_2: 
NetRA5_R1_3: 
NetRA5_R1_4: 
NetRA6_R0_1: 
NetRA6_R0_2: 
NetRA6_R0_3: 
NetRA6_R0_4: 
NetRA6_R1_1: 
NetRA6_R1_2: 
NetRA6_R1_3: 
NetRA6_R1_4: 
NetRA7_R0_1: 
NetRA7_R0_2: 
NetRA7_R0_3: 
NetRA7_R0_4: 
NetRA7_R1_1: 
NetRA7_R1_2: 
NetRA7_R1_3: 
NetRA7_R1_4: 
NetRA8_R0_1: 
NetRA8_R0_2: 
NetRA8_R0_3: 
NetRA8_R0_4: 
NetRA8_R1_1: 
NetRA8_R1_2: 
NetRA8_R1_3: 
NetRA8_R1_4: 
NetRA9_R0_1: 
NetRA9_R0_2: 
NetRA9_R0_3: 
NetRA9_R0_4: 
NetRA9_R1_1: 
NetRA9_R1_2: 
NetRA9_R1_3: 
NetRA9_R1_4: 
NetRA10_R0_5: 
NetRA10_R0_6: 
NetRA10_R0_7: 
NetRA10_R1_5: 
NetRA10_R1_6: 
NetRA10_R1_7: 
NetRA11_R0_5: 
NetRA11_R0_6: 
NetRA11_R0_7: 
NetRA11_R0_8: 
NetRA11_R1_5: 
NetRA11_R1_6: 
NetRA11_R1_7: 
NetRA11_R1_8: 
NetS1_I2C_2: 
"POWER GOOD": 
PROG_B: 
PWM0: 
PWM1: 
PWM2: 
PWM3: 
PWM4: 
PWM5: 
PWM6: 
PWM7: 
PWR_DOWN/INT: 
RD+: 
RD-: 
RDWR_B/WRU: 
RESET: 
RX_CLK: 
RX_DV: 
RX_ER: 
RXD_0: 
RXD_1: 
RXD_2: 
RXD_3: 
SCL: 
SCL_EXT: 
SCLK: 
SDA: 
SDA_EXT: 
"SERIAL IN": 
"SERIAL OUT": 
SPI_CS_F: 
SWITCH0: 
SWITCH1: 
SWITCH2: 
SWITCH3: 
TCK: 
TD+: 
TD-: 
TDI: 
TDO: 
TMS: 
TX_CLK: 
TX_EN: 
TXD_0: 
TXD_1: 
TXD_2: 
TXD_3: 
UBATT: 
VBUS: 
VBUS_SW: 
VREF: 
pads on no net: Fiducial11.0 Fiducial12_1.0

## Polygon pours and split planes (outlines as drawn)
GND on GND Plane1 (split plane): 200.794,0.306 0.306,0.306 0.306,137.744 200.794,137.744
GND on GND Plane2 (split plane): 200.794,0.306 0.306,0.306 0.306,137.744 200.794,137.744

## Other copper
Top Layer:
  text "Top View" at 111.4,-3.3 h2.54
  text ".Layer_Name" at 128.878,-23.546 h3.05
  text "3" at 215.238,-30.167 h2.03
MidLayer1:
  text ".Layer_Name" at 128.878,-23.546 h3.05
  text "4" at 215.238,-29.642 h2.03
1.2 & 2.5V Plane:
  text ".Layer_Name" at 128.878,-23.546 h3.05
  text "7" at 215.238,-29.642 h2.03
Bottom Layer:
  text "##: Manufacturer Logo" at 34.4,134.775 h1.5
  text "[.....]: Manufacturer Date" at 40.1,132.675 h1.5
  text "**: UL Logo" at 34.4,130.575 h1.5
  text "Bottom View" at 156.8,-3.3 h2.54
  text ".Layer_Name" at 128.878,-23.546 h3.05
  text "8" at 215.238,-30.167 h2.03
GND Plane1 (plane layer: these items are gaps in the copper):
  text ".Layer_Name" at 128.878,-23.546 h3.05
  text "5" at 215.238,-29.642 h2.03

## Silkscreen, mask and mechanical layers (free items; w line width, h text height)
Top Overlay:
  text ".Layer_Name" at 128.878,-23.546 h3.05
  text "1" at 215.238,-30.167 h2.03
Bottom Overlay:
  text ".Layer_Name" at 128.878,-23.546 h3.05
  text "2" at 215.238,-29.642 h2.03
Top Paste:
  text ".Layer_Name" at 128.878,-23.546 h3.05
  text "11" at 215.238,-29.642 h2.03
Top Solder:
  text ".Layer_Name" at 128.878,-23.546 h3.05
  text "12" at 215.238,-29.642 h2.03
Bottom Solder:
  text ".Layer_Name" at 128.878,-23.546 h3.05
  text "13" at 215.238,-29.642 h2.03
Mechanical 1:
  the board outline again, w0.2
Mechanical 2:
  text ".Layer_Name" at 128.878,-23.546 h3.05
  text "9" at 215.238,-30.167 h2.03
Mechanical 4:
  text ".Layer_Name" at 128.875,-23.6 h3.05
Mechanical 16:
  lines w0.127: -49.45,4.935 -44.37,4.935 ; -49.45,53.195 -44.37,53.195 ; -49.45,101.455 -44.37,101.455 ; 22.95,144.62 22.95,149.7 ; 23.575,-43.325 23.575,-38.245 ; 95.9,144.62 95.9,149.7 ; 96.6,-43.325 96.6,-38.245 ; 169.1,144.62 169.1,149.7 ; 169.625,-43.325 169.625,-38.245 ; 237.57,4.935 242.65,4.935 ; 237.57,53.195 242.65,53.195 ; 237.57,101.455 242.65,101.455 ; -49.45,-43.325 -49.45,149.715 242.65,149.715 242.65,-43.325 -49.45,-43.325 ; -44.37,-38.245 237.57,-38.245 237.57,144.635 -44.37,144.635 -44.37,-38.245
  lines w0.203: 77.55,-32.245 117.57,-32.245 ; 77.55,-26.245 237.57,-26.245 ; 77.55,-20.245 117.57,-20.245 ; 117.57,-38.245 117.57,-14.245 ; 197.57,-38.245 197.57,-14.245 ; 197.57,-32.245 237.57,-32.245 ; 197.57,-20.245 237.57,-20.245 ; 77.55,-38.245 77.55,-14.245 237.57,-14.245 237.57,-38.245 77.55,-38.245
  text "2" at 58.55,146.325 h1.78
  text "4" at 204.875,146.275 h1.78
  text "1" at -13.85,146.075 h1.78
  text "3" at 131.875,146 h1.78
  text "A" at -47.545,123.274 h1.78
  text "A" at 239.475,123.274 h1.78
  text "B" at -47.545,75.217 h1.78
  text "B" at 239.475,75.217 h1.78
  text "C" at -47.545,26.703 h1.78
  text "C" at 239.475,26.703 h1.78
  text "Panel of:" at 199.575,-18.245 h1.02
  text "GECKO3main V1" at 206.45,-18.325 h1.02
  text "Titel" at 128.682,-19.165 h3.3
  text "D" at -47.545,-21.303 h1.78
  text "D" at 239.475,-21.303 h1.78
  text "Index:" at 199.57,-24.245 h2.03
  text "x" at 214.73,-24.529 h2.5
  text "13.07.2007/zac1" at 93.375,-24.65 h2.03
  text "Modified:" at 79.57,-24.67 h2.03
  text "/13" at 218.413,-30.117 h2.03
  text "Sheet:" at 199.57,-30.245 h2.03
  text "Approved:" at 79.57,-30.67 h2.03
  text "16.07.2007" at 93.725,-30.775 h2.03
  text ".Pcb_File_Name_No_Path" at 79.475,-35.925 h1.27
  text "Doc. No:" at 199.57,-36.245 h2.03
  text "D00xxxx" at 214.57,-36.245 h2.5
  text "1" at -13.204,-41.674 h1.78
  text "2" at 59.44,-41.674 h1.78
  text "3" at 132.592,-41.674 h1.78
  text "4" at 205.49,-41.674 h1.78
Drill Drawing:
  text ".Layer_Name" at 128.878,-23.546 h3.05
  text "10" at 215.238,-30.167 h2.03
  text ".LEGEND" at -39.925,-30.277 h2.29
  text "Drilling Details." at -39.925,-34.087 h2.29

## Dimensions
0,0 to 0,138.05 on Mechanical 3
0,0 to 201.1,0 on Mechanical 3

## Panel: embedded boards
"gecko3.PcbDoc" at 191.075,128.025, 2 rows x 1 columns, spacing 64 x 86.6, rotation 180
"gecko3.PcbDoc" at 10,10, 2 rows x 1 columns, spacing 64 x 95.5, rotation 0